# Altium PCB PCB1.PcbDoc
Units mm, origin at the board's own origin, x right, y up, seen from the top; angles counter-clockwise.
Board outline 55.5 x 74.04 mm, 2 copper layers (Top Layer, Bottom Layer); 29 components, 50 nets, 134 pads, 18 vias.
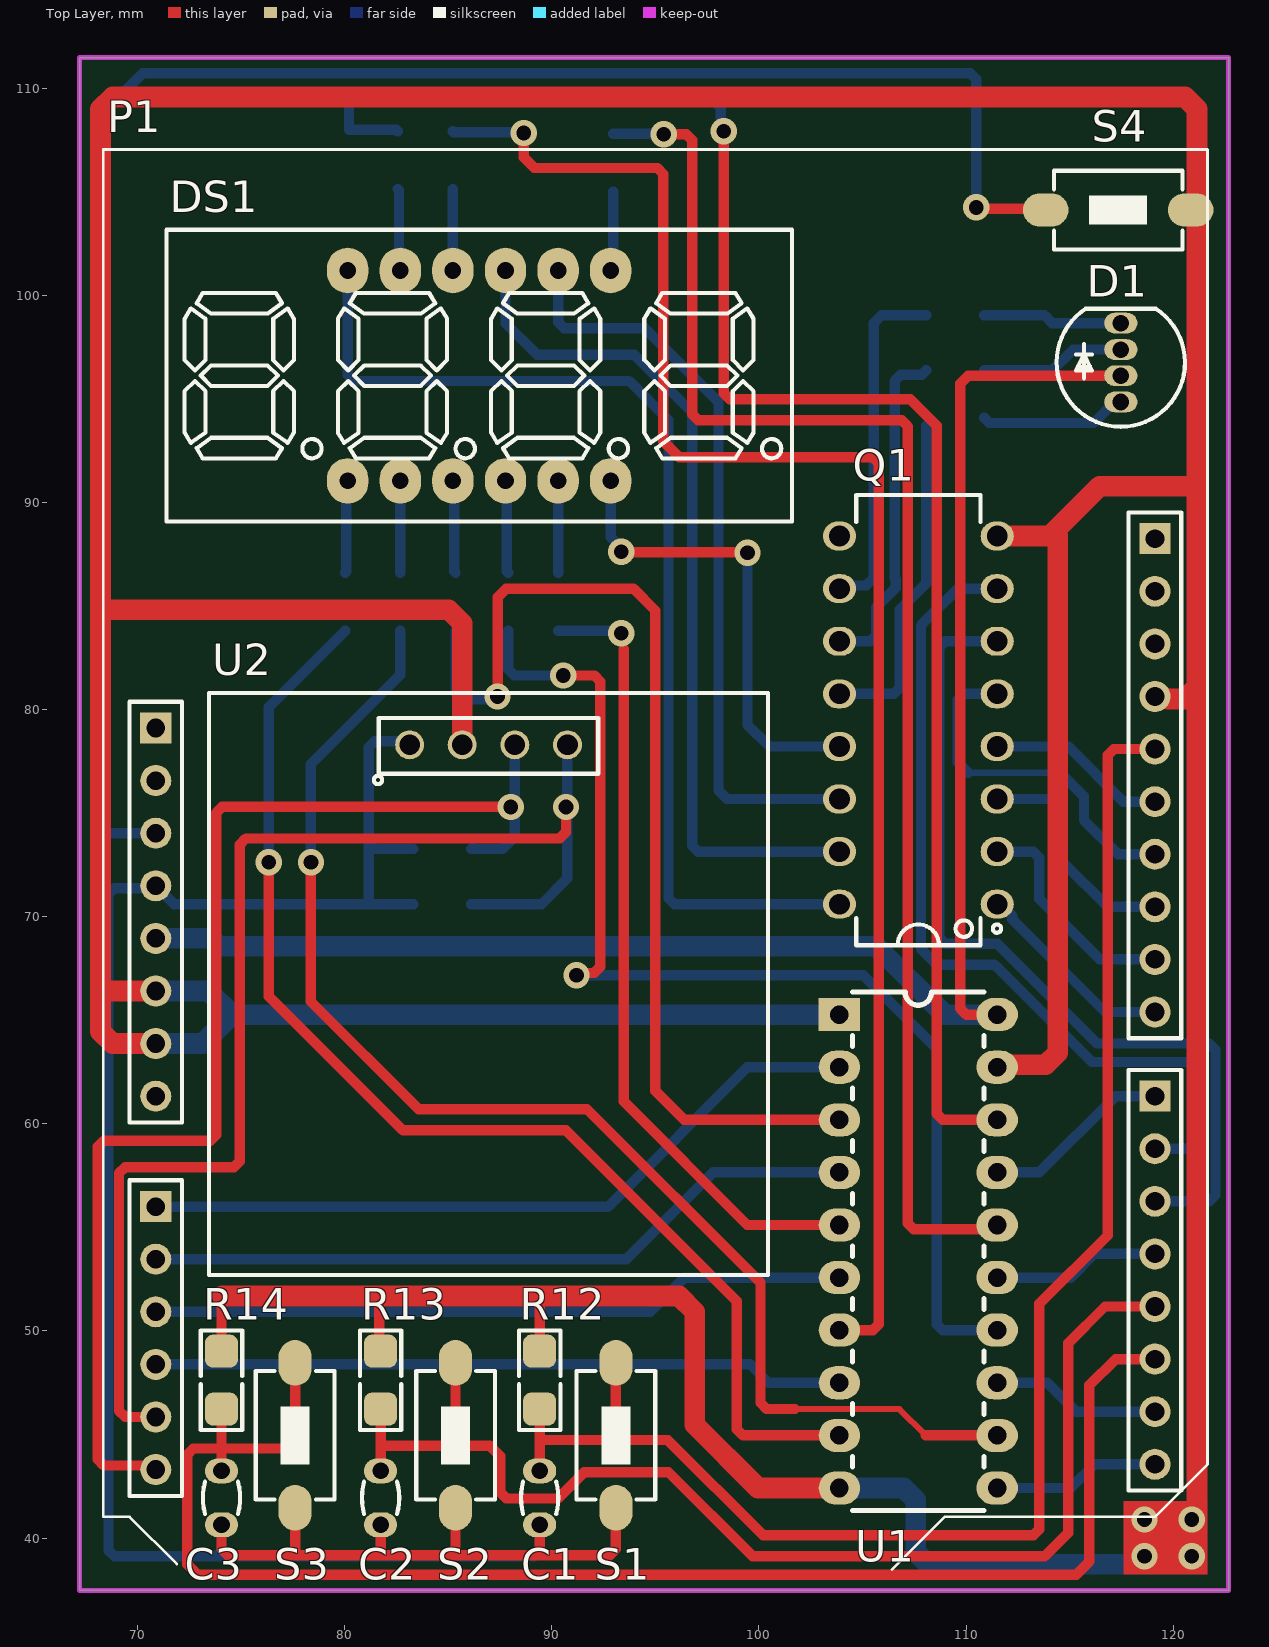
[diagram p0: Top Layer view]
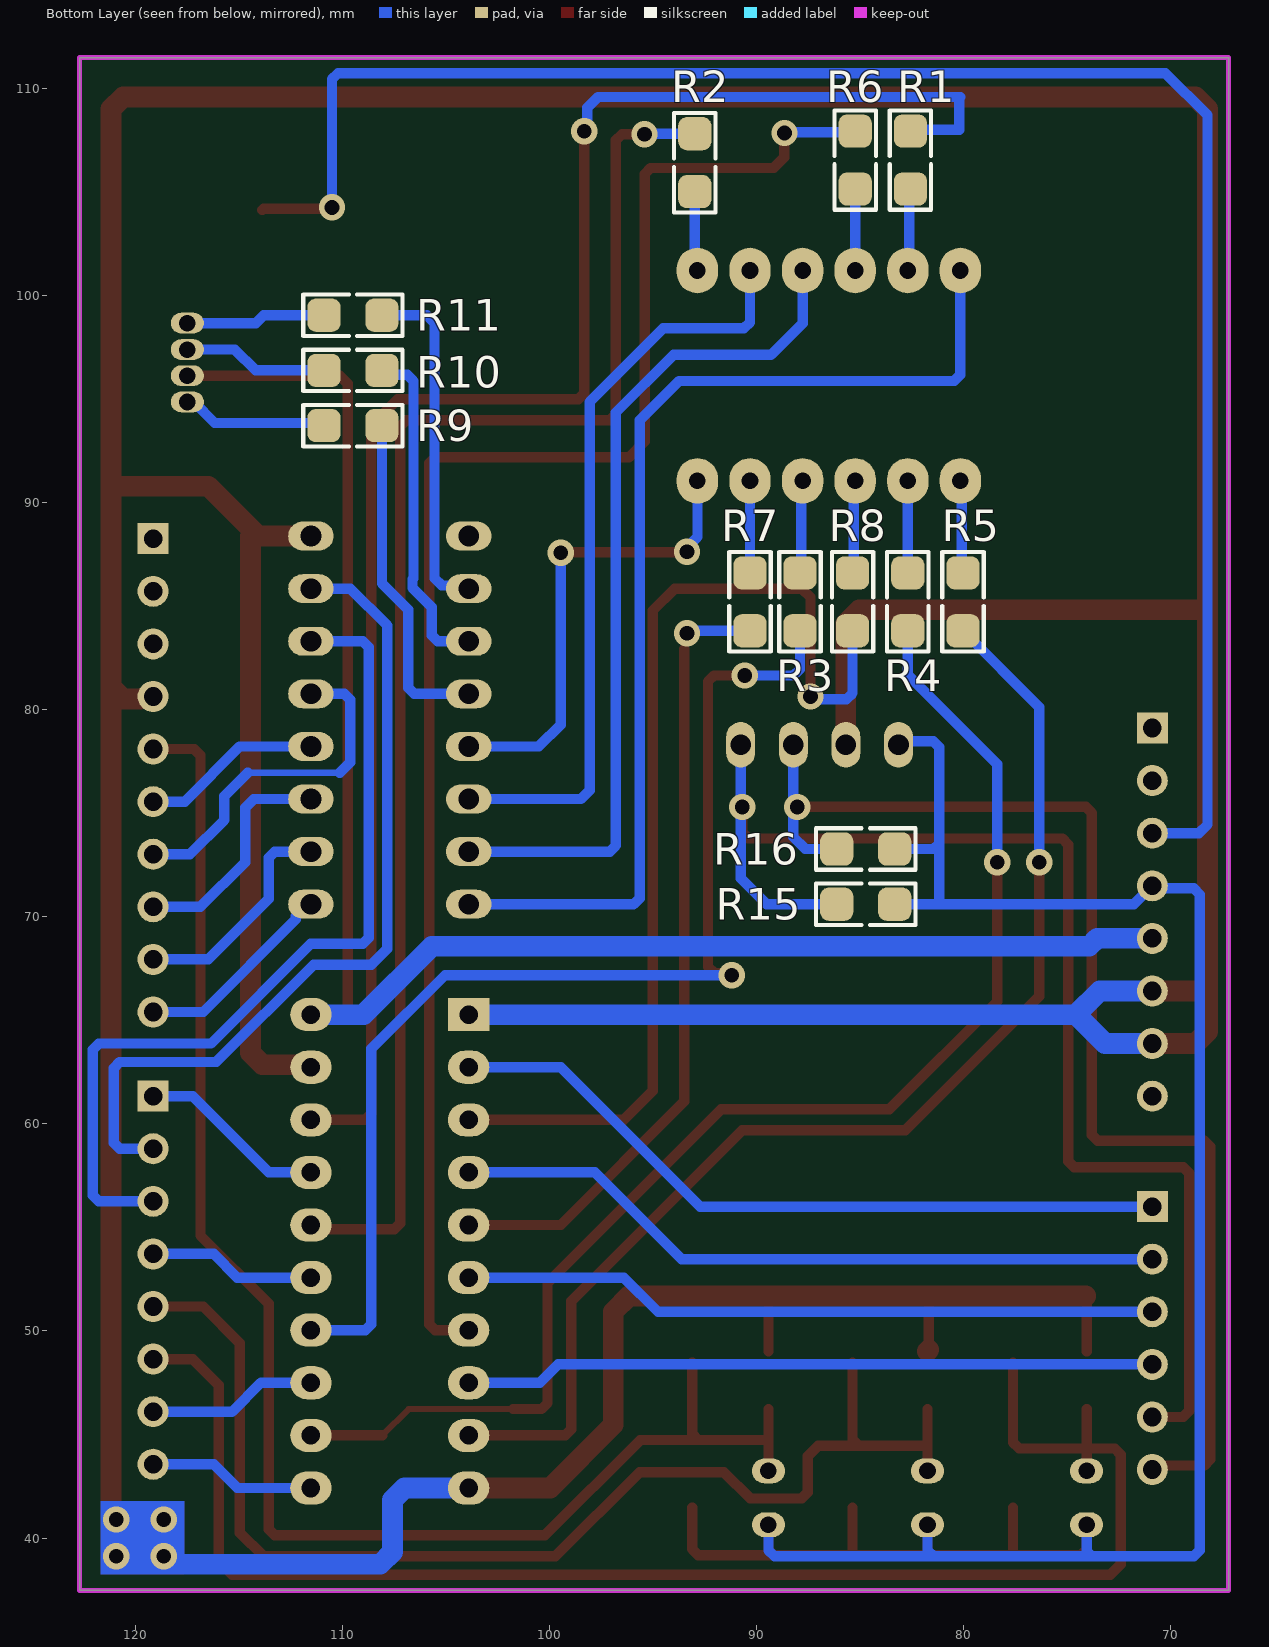
[diagram p1: Bottom Layer view, seen from below]

## Layer stack, top to bottom
Top Solder: solder mask 0.0102, Solder Resist, Dk 3.5
Top Layer: signal copper 0.0356
Dielectric 1: dielectric 0.32, FR-4, Dk 4.8
Bottom Layer: signal copper 0.0356
Bottom Solder: solder mask 0.0102, Solder Resist, Dk 3.5

## Board outline
67.183,37.465 122.682,37.465 122.682,111.506 67.183,111.506

## Design rules (kind name [scope] priority, off if disabled: settings)
Clearance [All] p1: gap=0.254 ignorepadtopadclearanceinfootprint=FALSE except(0: Arc-Hole Track-Hole SMDPad-Hole THPad-Hole Via-Hole Fill-Hole Poly-Hole Region-Hole Text-Hole)
PlaneClearance [All] p1: clearance=1
PolygonConnect [All] p1: connectstyle=Relief reliefconductorwidth=0.254 reliefentries=4 polygonreliefangle="90 Angle" airgapwidth=0.254
RoutingVias [All] p1: holewidth=0.711 width=1.27 viastyle="Through Hole" minholewidth=0.711 minwidth=1.27 maxholewidth=0.711 maxwidth=1.27
SolderMaskExpansion [All] p1: expansion=0.102 istentingtop=FALSE
Width [All] p1: maxlimit=1 minlimit=0.3 preferedwidth=0.5
29 further rules are at their usual default settings.

## Components (designator, comment, footprint, x,y, rotation, side; value= is the part's Value field where it differs from the comment)
C1 "100nF" C_CER_D3 89.408,41.94 r90 top
C2 "100nF" C_CER_D3 81.724,41.94 r90 top
C3 "100nF" C_CER_D3 74.041,41.94 r90 top
D1 "LED_RGB" LED5RGB 117.475,96.774 r90 top
DS1 "4Digit, Red" 7Seg-MPX4-30.2x14.1mm 86.487,96.139 r0 top
P1 "UNO" Arduino_uno_S_3 94.615,70.485 r0 top locked
Q1 "ULN2003" DIP_16 107.696,79.502 r180 top
R1 "470" R1206 82.55,106.553 r270 bottom
R2 "470" R1206 92.964,106.426 r270 bottom
R3 "470" R1206 87.884,85.217 r90 bottom
R4 "470" R1206 82.677,85.217 r90 bottom
R5 "470" R1206 80.01,85.217 r90 bottom
R6 "470" R1206 85.217,106.553 r270 bottom
R7 "470" R1206 90.297,85.217 r90 bottom
R8 "470" R1206 85.344,85.217 r90 bottom
R9 "470" R1206 109.474,93.726 r0 bottom
R10 "470" R1206 109.474,96.393 r0 bottom
R11 "470" R1206 109.474,99.06 r0 bottom
R12 "4.7K" R1206 89.408,47.625 r270 top
R13 "4.7K" R1206 81.724,47.625 r270 top
R14 "4.7K" R1206 74.041,47.625 r270 top
R15 "4.7K" R1206 84.709,70.612 r180 bottom
R16 "4.7K" R1206 84.709,73.279 r180 bottom
S1 "PB" SW_PB_SMD_2PIN_SPST_6X3X2 93.091,44.958 r90 top
S2 "PB" SW_PB_SMD_2PIN_SPST_6X3X2 85.344,44.958 r90 top
S3 "PB" SW_PB_SMD_2PIN_SPST_6X3X2 77.597,44.958 r90 top
S4 "PB" SW_PB_SMD_2PIN_SPST_6X3X2 117.348,104.14 r180 top
U1 "74HCT244" PDIP20 107.696,53.848 r0 top
U2 "OLED_SSD1306" OLED_SSD1306_64_I2C 86.938,78.31 r0 top

## Footprints (in the part's own frame and the unit in brackets; to place one, negate y for a bottom-side part, rotate by r counter-clockwise, add the part's x,y. Pads: shape width x height; smd on the part's side, far side on the other; paste and mask are expansions set on the pad)
7Seg-MPX4-30.2x14.1mm [mm] "Display, 12-Leads, Body 30/2x14/1mm"
  oval 2x2.2 hole 0.8: 1(-6.35,-5.08) 2(-3.81,-5.08) 3(-1.27,-5.08) 4(1.27,-5.08) 5(3.81,-5.08) 6(6.35,-5.08) 7(6.35,5.08) 8(3.81,5.08) 9(1.27,5.08) 10(-1.27,5.08) 11(-3.81,5.08) 12(-6.35,5.08)
  silkscreen extent -15.1,-7.05 15.1,7.05, body extent -15,-7 15,7, height 7.1
Arduino_uno_S_3 [mm]
  rect 1.5x1.5 hole 0.9: 1(-23.749,8.636) 9(-23.749,-14.478) 22(24.511,-9.144) 32(24.511,17.78)
  round 1.5 hole 0.9: 2(-23.749,6.096) 3(-23.749,3.556) 4(-23.749,1.016) 5(-23.749,-1.524) 6(-23.749,-4.064) 7(-23.749,-6.604) 8(-23.749,-9.144) 10(-23.749,-17.018) 11(-23.749,-19.558) 12(-23.749,-22.098) 13(-23.749,-24.638) 14(-23.749,-27.178) 15(24.511,-26.924) 16(24.511,-24.384) 17(24.511,-21.844) 18(24.511,-19.304) 19(24.511,-16.764) 20(24.511,-14.224) 21(24.511,-11.684) 23(24.511,-5.08) 24(24.511,-2.54) 25(24.511,0) 26(24.511,2.54) 27(24.511,5.08) 28(24.511,7.62) 29(24.511,10.16) 30(24.511,12.7) 31(24.511,15.24)
  silkscreen extent -26.29,-32 27.05,36.58, body extent -25.02,-28.31 25.78,19.05, height 8.51
C_CER_D3 [mm] "CAP, CER MULTILAYER, D:3.5mm, pitch: 2.54mm"
  oval 1.2x1.6 hole 0.8: 1(-1.3,0) 2(1.3,0)
  silkscreen extent -0.78,-0.9 0.78,0.9, body extent -1.75,-0.75 1.75,0.75, height 4
DIP_16 [mm] "DIP, pitch 2.54mm, 300mil Width"
  oval 1.6x1.4 / inner round 1.4 / far side oval 2.2x1.4 hole 1: 1(-3.81,8.89) 2(-3.81,6.35) 3(-3.81,3.81) 4(-3.81,1.27) 5(-3.81,-1.27) 6(-3.81,-3.81) 7(-3.81,-6.35) 8(-3.81,-8.89) 9(3.81,-8.89) 10(3.81,-6.35) 11(3.81,-3.81) 12(3.81,-1.27) 13(3.81,1.27) 14(3.81,3.81) 15(3.81,6.35) 16(3.81,8.89)
  silkscreen extent -4,-10.87 3,10.87, body extent -3.93,-10 3.94,10, height 5.1
LED5RGB [mm] "LED THD 5MM RGB"
  oval 1x1.6 hole 0.8 mask+0.1: 1(-1.905,0) 2(-0.635,0) 3(0.627,0) 4(1.905,0)
  silkscreen extent -3.1,-3.1 2.6,3.1, body extent -2.83,-2.95 2.63,2.95, height 9.6
OLED_SSD1306_64_I2C [mm] "OLED SS1306 Breakout, 128X64, I2C"
  round 1.4 / inner round 1.4 / far side oval 1.4x2.2 hole 1 mask+0.1: 1(-3.81,0) 2(-1.27,0) 3(1.27,0) 4(3.81,0)
  silkscreen extent -13.5,-25.6 13.5,2.5, body extent -13.35,-25.5 13.35,2.36, height 13.97
PDIP20 [mm] "20-Pin Plastic DIP (DD20) NARROW_(300mil width) - 100mil pitch"
  rect 2x1.6 hole 0.9: 1(-3.81,11.43)
  oval 2x1.6 hole 0.9: 2(-3.81,8.89) 3(-3.81,6.35) 4(-3.81,3.81) 5(-3.81,1.27) 6(-3.81,-1.27) 7(-3.81,-3.81) 8(-3.81,-6.35) 9(-3.81,-8.89) 10(-3.81,-11.43) 11(3.81,-11.43) 12(3.81,-8.89) 13(3.81,-6.35) 14(3.81,-3.81) 15(3.81,-1.27) 16(3.81,1.27) 17(3.81,3.81) 18(3.81,6.35) 19(3.81,8.89) 20(3.81,11.43)
  silkscreen extent -3.17,-12.52 3.17,12.52, body extent -3.94,-12.51 3.94,12.51, height 3.76
R1206 [mm] "CHIP RESISTOR 1/4 WATT, Body 3.2x1.6mm,1206, 3216"
  rrect50% 1.6x1.6 smd mask+0.075: 1(-1.4,0) 2(1.4,0)
  Top Layer pour cut-out: -0.8,1 -0.8,-1 0.8,-1 0.8,1
  silkscreen extent -2.4,-1 2.4,1, body extent -1.68,-0.86 1.68,0.86, height 0.85
SW_PB_SMD_2PIN_SPST_6X3X2 [mm] "SWITCH, PUSHBUTTON, SMD, SPST, 6X3.5X2.5mm, RS-282G05A3, SKQYPA, 50000 Cycles"
  oval 2.2x1.6 smd mask+0.1: 1(-3.5,0) 2(3.5,0)
  silkscreen extent -3.1,-1.9 3.1,1.9, body extent -3.4,-1.86 3.4,1.86, height 2.5

## Part data
C1 C2 C3: library part CAP_THD_CERML, "CAP, THD, CER MULTI LAYER,", ASSEMBLY=ASSEMBLY, DESC="CAP, CER MULTI LAYER,", MANF=MANF, MANF_P#=MANF_PART#, PARAM=50V, PARAM2=PARAM2, PRICE="100= 1$"
D1: library part LED_THD_5MM_RGB_CA, "LED, THD, 5MM, RGB COMMON CATHODE", ASSEMBLY=ASSEMBLY, DESC=DESCRIPTION, MANF="CHINA YOUNG", MANF_P#=YSL-R596CR3G4B5C-C10, PRICE=PRICE
DS1: library part ModSen_7Seg_MPX4_CC, "7Segment-MPX4-CC", Package=Package?, Rating=Rating?, Inflow=8128, Type=Type?
P1: library part Con_Arduino_UNO_S, "Arduino uno slave", Package=Package?, Rating=Rating?, Inflow=inflow?, Type=Type?
Q1: library part ULN2003_DIP16, "Darlington, 7-CH, 50V, 0.5A", MANF=DIODES, MANF_P#=ULN2003A, PARAM="7-CH, 50V, 0.5A", PARAM2=-
R1 R2 R3 R4 R5 R6 R7 R8 R9 R10 R11 R12 R13 R14 R15 R16: library part RES_SMD_1206, "RESISTOR, SMD", ASSEMBLY=ASSEMBLY, DESC=DESCRIPTION, DIST#=MOUSER, MANF=-, MANF_P#=-, PARAM=-W, PARAM2=1%, PRICE="100= 0.5$"
S1 S2 S3 S4: library part SW_PushButton_2_SMD, "SMT Tactile ‎Switch", Package=SMD, Rating=2b, Inflow=8260, Type=Vertical
U1: library part IC_Logic_74HCT244, "Octal Bus Buffer with 3 State Outputs (Non Inverted)", Package=Dip, Rating=8b, Inflow=1118, Type="3-State Non-Inverting"
U2: library part OLED_SSD1306_64_I2C, "OLED, SSD1306, 0.96\", 128X64, BREAKOUT I2C", MANF=-, MANF_P#=OLED_SSD1306_I2C, PARAM="2 Colors, 0.96\", 128X64", PARAM2="3.3/5VCC, -20~70oC"

## Via types
v1: diameter 1.27, hole 0.711, Top Layer to Bottom Layer, 18 vias

## Nets (pads, with @x,y where several pads share a name; then routed paths per layer and width w, separated by ;. In a path a pad name is that pad's centre, name@x,y a point inside that pad or via, vN(x,y) a via of type N, cw(c..) or ccw(c..) an arc to the next point about the centre after c; other vN are vias at no path point)
+3.3: C1.1 C2.1 C3.1 P1.4 R15.2 R16.2 S1.1 S2.1 S3.1 U2.1 | length 114.6
  Top Layer w0.5: C3.1 74.041,39.467 74.334,39.174 77.47,39.174 ; S3.1 77.597,39.301 77.47,39.174 ; C2.1 81.724,39.238 81.661,39.174 ; S2.1 85.344,39.301 85.217,39.174 ; C1.1 89.408,39.428 89.154,39.174 ; S1.1 93.091,39.467 92.798,39.174 89.154,39.174 ; 77.47,39.174 81.661,39.174 ; 81.661,39.174 85.217,39.174 ; 85.217,39.174 89.154,39.174
  Bottom Layer w0.5: P1.4@70.866,71.374 68.873,71.374 68.58,71.081 68.58,39.409 68.873,39.116 73.787,39.116 ; P1.4 71.755,70.612 81.153,70.612 ; C3.1 74.041,39.37 73.787,39.116 ; C2.1 81.724,39.409 81.432,39.116 ; U2.1 82.952,78.486 81.446,78.486 81.153,78.193 81.153,73.541 ; R15.2 81.28,70.612 81.153,70.739 81.153,73.541 ; R16.2 81.415,73.279 81.153,73.541 ; C1.1 89.408,39.409 89.115,39.116 81.432,39.116 ; 73.787,39.116 81.432,39.116
+5: D1.2 P1.5 U1.20 | length 82.2
  Top Layer w0.5: U1.20 110.021,65.278 109.728,65.571 109.728,95.758 110.109,96.139 D1.2
  Bottom Layer w1: P1.5 73.533,68.961 73.914,68.58 105.664,68.58 108.966,65.278 U1.20
Digit1: P1.23 Q1.1 | length 9.9
  Bottom Layer w0.5: Q1.1 111.662,70.612 112.231,70.043 112.231,69.887 116.713,65.405 P1.23
Digit2: P1.24 Q1.2 | length 10.9
  Bottom Layer w0.5: Q1.2 113.245,73.152 113.538,72.859 113.538,70.866 116.459,67.945 P1.24
Digit3: P1.25 Q1.3 | length 11.3
  Bottom Layer w0.5: Q1.3 114.261,75.692 114.681,75.272 114.681,72.644 116.84,70.485 P1.25
Digit4: P1.27 Q1.4 | length 8.7
  Bottom Layer w0.5: Q1.4 114.935,78.232 117.602,75.565 P1.27
GND: P1.6 P1.7 P1.29 Q1.8 R12.1 R13.1 R14.1 S4.1 U1.1 U1.10 U1.19 U2.2 | length 341.7
  Top Layer w0.5: R14.1 74.041,51.65 ; R13.1@81.661,49.088 81.661,51.435 ; R12.1 89.408,51.689
  Top Layer w1: P1.7 68.785,63.881 68.199,64.467 68.199,66.128 ; P1.6 68.492,66.421 68.199,66.128 ; 74.08,51.689 89.408,51.689 96.139,51.689 96.901,50.927 96.901,45.466 99.949,42.418 U1.10 ; R13.1@81.661,49.088 R13.1 ; U2.2 85.668,84.18 85.012,84.836 68.199,84.836 ; U1.19 111.621,62.853 113.841,62.853 114.427,63.439 114.427,88.392 114.046,88.392 ; Q1.8 114.046,88.392 ; P1.29 119.222,80.549 119.712,80.549 119.744,80.518 120.572,80.518 121.158,81.104 ; v1@121.031,39.116 121.158,39.243 121.158,81.104 ; 68.199,66.128 68.199,84.836 ; 68.199,84.836 68.199,109.015 68.785,109.601 120.572,109.601 121.158,109.015 121.158,90.805 ; 114.046,88.392 116.459,90.805 121.158,90.805 ; 121.158,81.104 121.158,90.805
  Bottom Layer w1: P1.7 73.152,63.881 74.549,65.278 ; P1.6 73.406,66.421 74.549,65.278 ; U1.10 106.983,42.418 107.569,41.832 107.569,39.321 108.155,38.735 118.11,38.735 v1@118.618,39.243 ; U1.1 74.549,65.278 ; v1@118.618,38.989 120.904,38.989 v1@121.158,39.243
  other v1: 118.618,39.116 120.904,39.116 118.618,40.894 120.904,40.894
NetD1_1: D1.1 R9.2 | length 7.1
  Bottom Layer w0.5: R9.2@110.874,94.107 111.128,93.853 116.159,93.853 117.175,94.869 D1.1
NetD1_3: D1.3 R10.2 | length 7
  Bottom Layer w0.5: R10.2 114.173,96.393 115.181,97.401 D1.3
NetD1_4: D1.4 R11.2 | length 6.8
  Bottom Layer w0.5: R11.2 113.792,99.06 114.173,98.679 D1.4
NetDS1_1: DS1.1 R5.2 | length 4.5
  Bottom Layer w0.5: R5.2 80.073,86.68 80.073,90.995 DS1.1
NetDS1_2: DS1.2 R4.2 | length 4.4
  Bottom Layer w0.5: R4.2 DS1.2
NetDS1_3: DS1.3 R8.2 | length 4.5
  Bottom Layer w0.5: DS1.3 85.281,90.995 85.281,86.68 R8.2
NetDS1_4: DS1.4 R3.2 | length 4.5
  Bottom Layer w0.5: DS1.4 87.82,90.995 87.82,86.68 R3.2
NetDS1_5: DS1.5 R7.2 | length 4.4
  Bottom Layer w0.5: R7.2 DS1.5
NetDS1_6: DS1.6 Q1.13 | length 22.9
  Top Layer w0.5: v1(93.345,87.63) 93.367,87.608 99.423,87.608 v1(99.445,87.585)
  Bottom Layer w0.5: DS1.6 92.837,88.346 93.345,87.838 v1(93.345,87.63) ; v1(99.445,87.585) 99.445,79.283 100.496,78.232 Q1.13
NetDS1_7: DS1.7 R2.2 | length 3.9
  Bottom Layer w0.5: DS1.7 92.964,101.346 R2.2
NetDS1_8: DS1.8 Q1.14 | length 36.6
  Bottom Layer w0.5: DS1.8 90.297,98.718 90.59,98.425 94.488,98.425 98.044,94.869 98.044,76.112 98.464,75.692 Q1.14
NetDS1_9: DS1.9 Q1.15 | length 41.5
  Bottom Layer w0.5: DS1.9 87.757,98.679 89.281,97.155 93.98,97.155 96.774,94.361 96.774,73.445 97.067,73.152 Q1.15
NetDS1_10: DS1.10 R6.2 | length 3.9
  Bottom Layer w0.5: DS1.10 R6.2
NetDS1_11: DS1.11 R1.2 | length 4
  Bottom Layer w0.5: R1.2 82.614,105.09 82.614,101.282 DS1.11
NetDS1_12: DS1.12 Q1.16 | length 52.9
  Bottom Layer w0.5: DS1.12 80.137,96.178 80.43,95.885 93.726,95.885 95.631,93.98 95.631,70.905 95.924,70.612 Q1.16
NetQ1_10: Q1.10 R11.1 | length 16.9
  Bottom Layer w0.5: Q1.10 104.04,86.006 105.183,86.006 105.537,86.36 105.537,98.679 105.918,99.06 R11.1
NetQ1_11: Q1.11 R10.1 | length 16.3
  Bottom Layer w0.5: Q1.11 105.371,83.312 105.664,83.605 105.664,84.963 106.6,85.899 106.6,86.313 106.553,86.36 106.553,95.885 106.846,96.178 107.859,96.178 R10.1
NetQ1_12: Q1.12 R9.1 | length 16.2
  Bottom Layer w0.5: Q1.12 106.514,80.772 106.807,81.065 106.807,84.836 108.074,86.103 R9.1
NetR1_1: R1.1 U1.18 | length 83.3
  Top Layer w0.5: v1(98.298,107.95) 98.298,95.289 98.591,94.996 107.315,94.996 108.585,93.726 108.585,60.491 108.878,60.198 U1.18
  Bottom Layer w0.5: R1.1 82.488,108.015 80.199,108.015 80.199,109.539 80.137,109.601 97.637,109.601 98.151,109.087 98.151,108.097 v1(98.298,107.95)
NetR2_1: R2.1 U1.16 | length 70.8
  Top Layer w0.5: v1(95.396,107.796) 96.481,107.796 96.774,107.503 96.774,94.273 97.067,93.98 106.895,93.98 107.188,93.687 107.188,55.2 107.481,54.908 111.296,54.908 U1.16
  Bottom Layer w0.5: R2.1 95.366,107.826 v1(95.396,107.796)
NetR3_1: R3.1 U1.14 | length 56.9
  Top Layer w0.5: v1(90.551,81.661) 92.036,81.661 92.329,81.368 92.329,67.584 92.036,67.292 91.295,67.292 v1(91.186,67.183)
  Bottom Layer w0.5: R3.1 87.884,81.954 88.177,81.661 v1(90.551,81.661) ; v1(91.186,67.183) 105.029,67.183 108.585,63.627 108.585,50.331 108.878,50.038 U1.14
NetR4_1: R4.1 U1.12 | length 64.9
  Top Layer w0.3: 101.727,46.228 106.786,46.228 108.056,44.958
  Top Layer w0.5: v1@78.359,72.898 78.359,65.913 83.566,60.706 91.694,60.706 100.076,52.324 100.076,46.521 100.369,46.228 101.727,46.228 ; 108.056,44.958 U1.12
  Bottom Layer w0.5: v1@78.359,72.898 78.359,77.367 82.677,81.685 R4.1
  other v1: 78.359,72.644
NetR5_1: R5.1 U1.9 | length 59.1
  Top Layer w0.5: v1@76.327,72.517 76.327,66.167 82.804,59.69 90.678,59.69 98.933,51.435 98.933,45.251 99.226,44.958 U1.9
  Bottom Layer w0.5: v1@76.327,72.517 76.327,80.134 R5.1
  other v1: 76.327,72.644
NetR6_1: R6.1 U1.7 | length 79.1
  Top Layer w0.5: v1(88.634,107.855) 88.646,107.844 88.646,106.68 89.154,106.172 95.084,106.172 95.377,105.879 95.377,92.964 96.139,92.202 105.498,92.202 105.791,91.909 105.791,50.331 105.498,50.038 U1.7
  Bottom Layer w0.5: R6.1 85.266,107.904 88.585,107.904 v1(88.634,107.855)
NetR7_1: R7.1 U1.5 | length 37.8
  Top Layer w0.5: 93.472,82.931 93.472,61.087 99.441,55.118 U1.5
  Bottom Layer w0.5: R7.1 93.221,83.817 v1(93.345,83.693)
NetR8_1: R8.1 U1.3 | length 50.9
  Top Layer w0.5: v1(87.376,80.645) 87.376,85.432 87.796,85.852 93.941,85.852 94.996,84.797 94.996,61.595 96.393,60.198 U1.3
  Bottom Layer w0.5: R8.1 85.344,80.811 85.637,80.518 87.249,80.518 v1(87.376,80.645)
RESET: P1.3 S4.2 | length 89.9
  Top Layer w0.5: v1(110.49,104.267) 110.553,104.203 113.784,104.203 S4.2
  Bottom Layer w0.5: P1.3 68.619,74.041 68.199,74.461 68.199,108.712 70.231,110.744 110.197,110.744 110.49,110.451 v1(110.49,104.267)
RGB_B: P1.26 Q1.5 | length 17.1
  Bottom Layer w0.3: 110.109,76.962 114.554,76.962
  Bottom Layer w0.5: 110.109,76.962 109.601,77.47 109.601,80.479 109.894,80.772 Q1.5 ; 114.554,76.962 115.697,75.819 115.697,74.676 117.348,73.025 P1.26
RGB_G: P1.21 Q1.7 | length 41.3
  Bottom Layer w0.5: Q1.7 109.601,85.852 107.823,84.074 107.823,68.453 108.585,67.691 111.379,67.691 116.078,62.992 120.738,62.992 121.031,62.699 121.031,59.094 120.738,58.801 P1.21
RGB_R: P1.20 Q1.6 | length 42.2
  Bottom Layer w0.5: Q1.6@111.114,83.312 109.005,83.312 108.712,83.019 108.712,69 109.005,68.707 111.506,68.707 116.332,63.881 121.754,63.881 122.047,63.588 122.047,56.554 121.754,56.261 P1.20
SCL: P1.14 R16.1 U2.3 | length 60.8
  Top Layer w0.5: P1.14 70.675,43.498 68.365,43.498 68.072,43.791 68.072,58.889 68.365,59.182 73.494,59.182 73.787,59.475 73.787,75.018 74.08,75.311 v1(88.011,75.311)
  Bottom Layer w0.5: R16.1@86.171,73.341 R16.1 87.63,73.279 88.208,73.857 88.208,75.311 U2.3
SDA: P1.13 R15.1 U2.4 | length 63.6
  Top Layer w0.5: P1.13 69.381,45.847 69.088,46.14 69.088,57.619 69.381,57.912 74.637,57.912 74.93,58.205 74.93,73.494 75.223,73.787 90.385,73.787 90.678,74.08 v1(90.678,75.311)
  Bottom Layer w0.5: R15.1 89.496,70.612 90.748,71.864 U2.4
Seg1: P1.9 U1.2 | length 35.8
  Bottom Layer w0.5: P1.9 92.71,56.007 99.441,62.738 U1.2
Seg2: P1.10 U1.4 | length 34.8
  Bottom Layer w0.5: P1.10 93.599,53.467 97.79,57.658 U1.4
Seg3: P1.11 U1.6 | length 33.7
  Bottom Layer w0.5: P1.11 94.742,50.927 96.393,52.578 U1.6
Seg4: P1.12 U1.8 | length 33.4
  Bottom Layer w0.5: P1.12 99.568,48.387 100.457,47.498 U1.8
Seg5: P1.15 U1.11 | length 8.1
  Bottom Layer w0.5: U1.11 115.062,42.418 116.205,43.561 P1.15
Seg6: P1.16 U1.13 | length 8.2
  Bottom Layer w0.5: U1.13 113.919,47.498 115.316,46.101 P1.16
Seg7: P1.19 U1.15 | length 8.1
  Bottom Layer w0.5: U1.15 115.062,52.578 116.205,53.721 P1.19
Seg8: P1.22 U1.17 | length 9.1
  Bottom Layer w0.5: U1.17 113.538,57.658 117.221,61.341 P1.22
SW1: C3.2 P1.17 R14.2 S3.2 | length 73.8
  Top Layer w0.5: C3.2 74.041,44.323 ; R14.2 74.041,44.323 ; S3.2 77.597,44.616 77.304,44.323 74.041,44.323 ; P1.17 117.221,48.641 115.951,47.371 115.951,38.862 115.316,38.227 72.898,38.227 72.39,38.735 72.39,44.03 72.683,44.323 74.041,44.323
SW2: C2.2 P1.18 R13.2 S2.2 | length 59.2
  Top Layer w0.5: C2.2 81.724,44.577 ; R13.2 81.724,44.577 ; S2.2 85.344,44.743 85.051,44.45 ; P1.18 116.713,51.181 114.935,49.403 114.935,40.259 113.792,39.116 99.695,39.116 95.631,43.18 91.567,43.18 90.297,41.91 87.796,41.91 87.503,42.203 87.503,43.942 86.995,44.45 85.051,44.45 ; 81.724,44.577 81.852,44.45 85.051,44.45
SW3: C1.2 P1.28 R12.2 S1.2 | length 74.2
  Top Layer w0.5: C1.2 89.408,44.732 ; R12.2 89.408,44.732 ; S1.2 93.091,45.025 92.798,44.732 ; P1.28 117.133,78.105 116.84,77.812 116.84,54.61 113.538,51.308 113.538,40.425 113.245,40.132 100.203,40.132 95.603,44.732 92.798,44.732 ; 89.408,44.732 92.798,44.732
pads on no net: P1.1 P1.2 P1.8 P1.30 P1.31 P1.32 Q1.9

## Keep-outs
Keep-Out Layer:
  the board outline again, w0.254

## Other copper
Top Layer:
  rectangle net GND: 117.602,38.227 121.666,41.783
Bottom Layer:
  rectangle net GND: 117.602,38.227 121.666,41.783